# Altium PCB LiPo_batteries_charger.PcbDoc
Units mil, origin at the board's own origin, x right, y up, seen from the top; angles counter-clockwise.
Board outline 2240 x 2210 mil, 2 copper layers (Top Layer, Bottom Layer); 22 components, 10 nets, 59 pads, 11 vias.
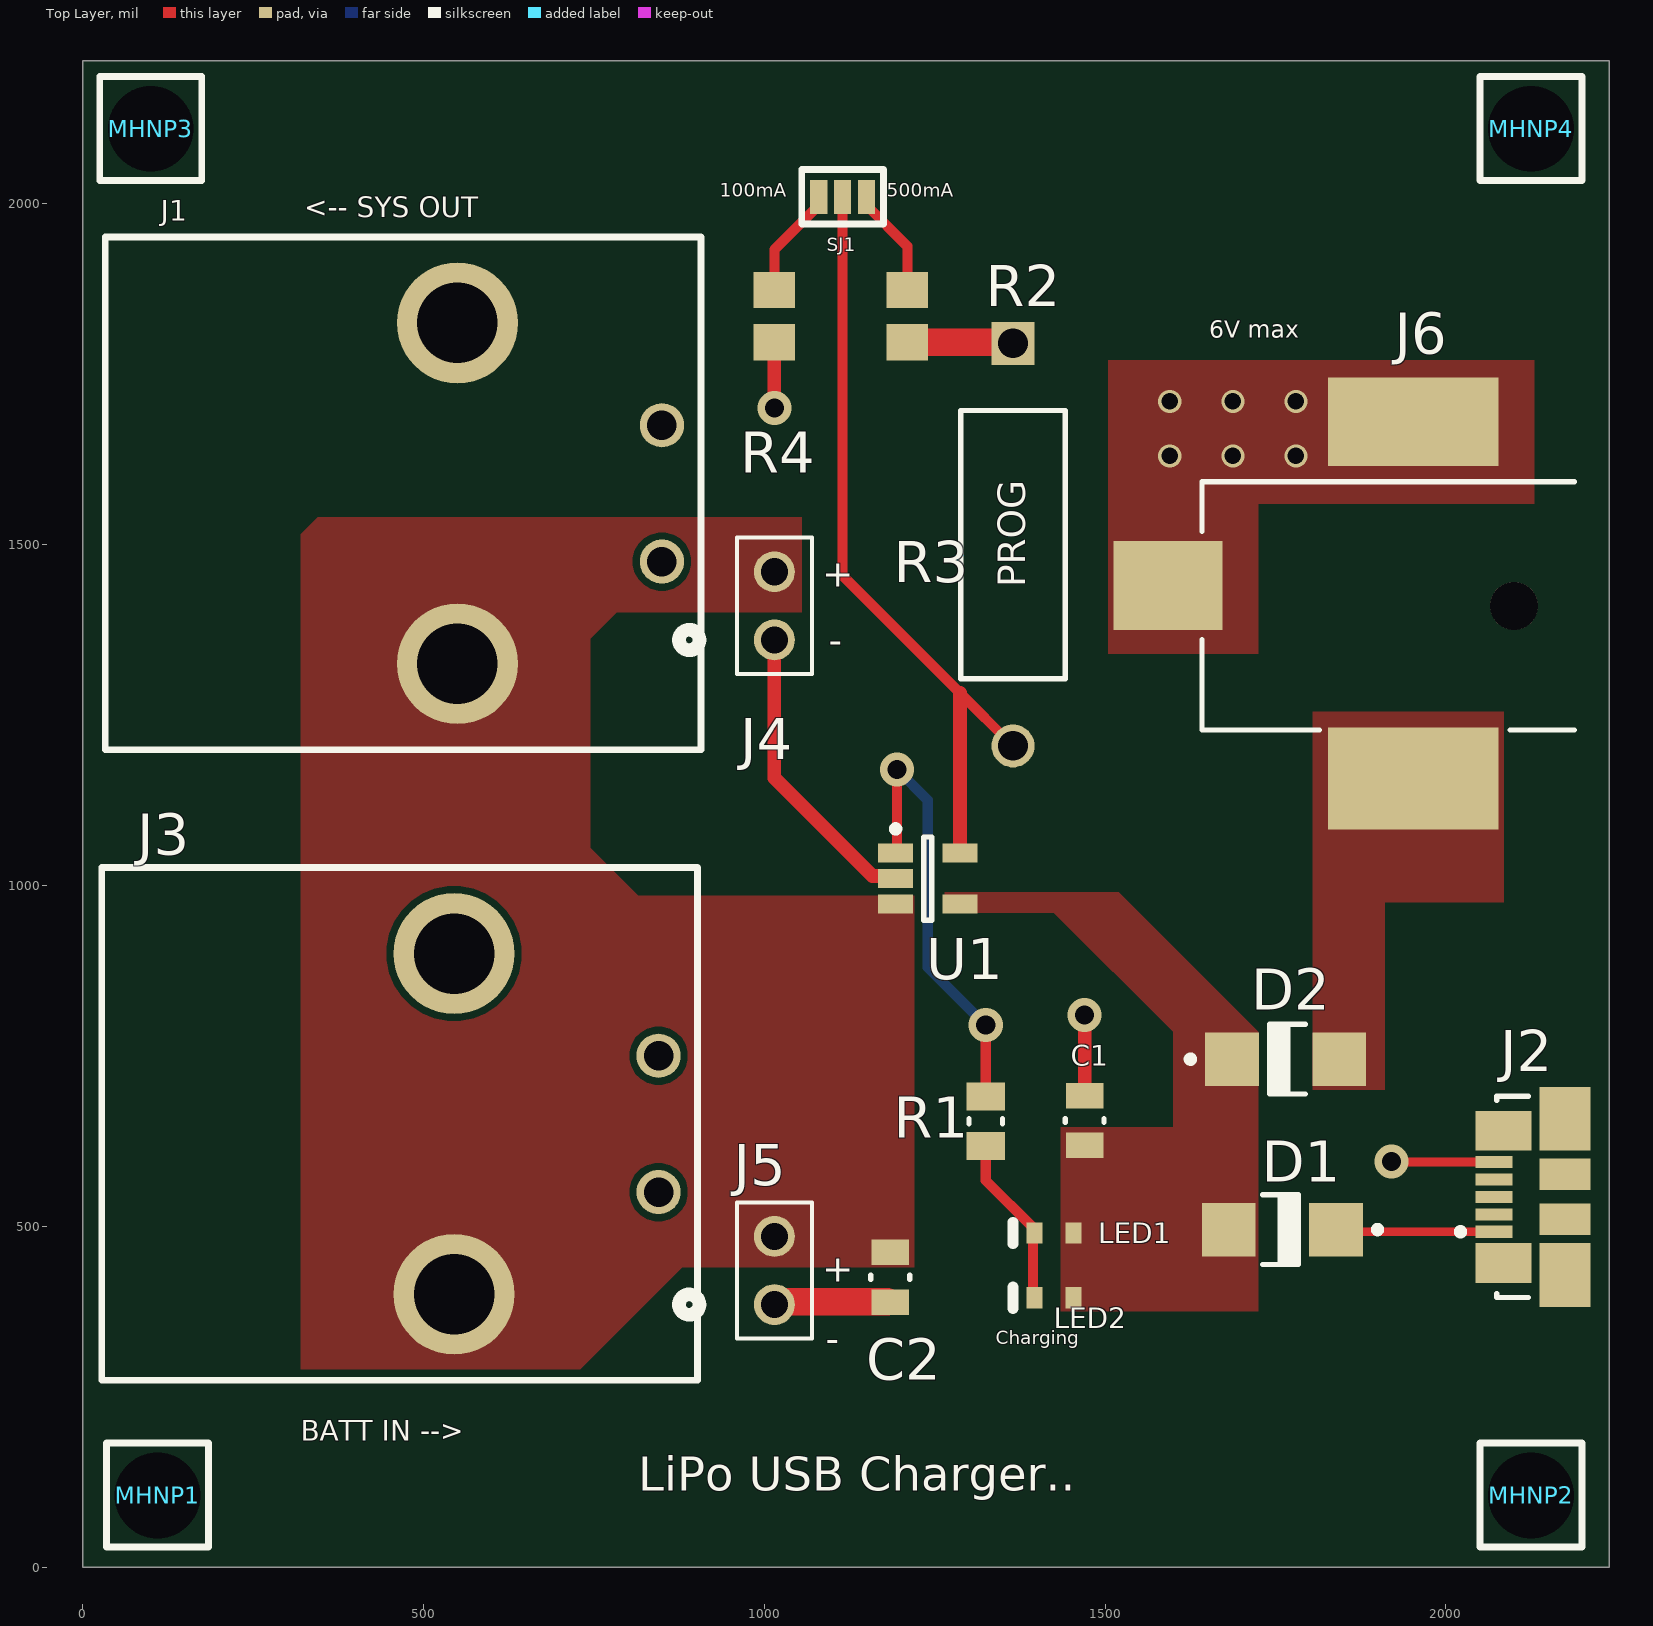
[diagram p0: Top Layer view]
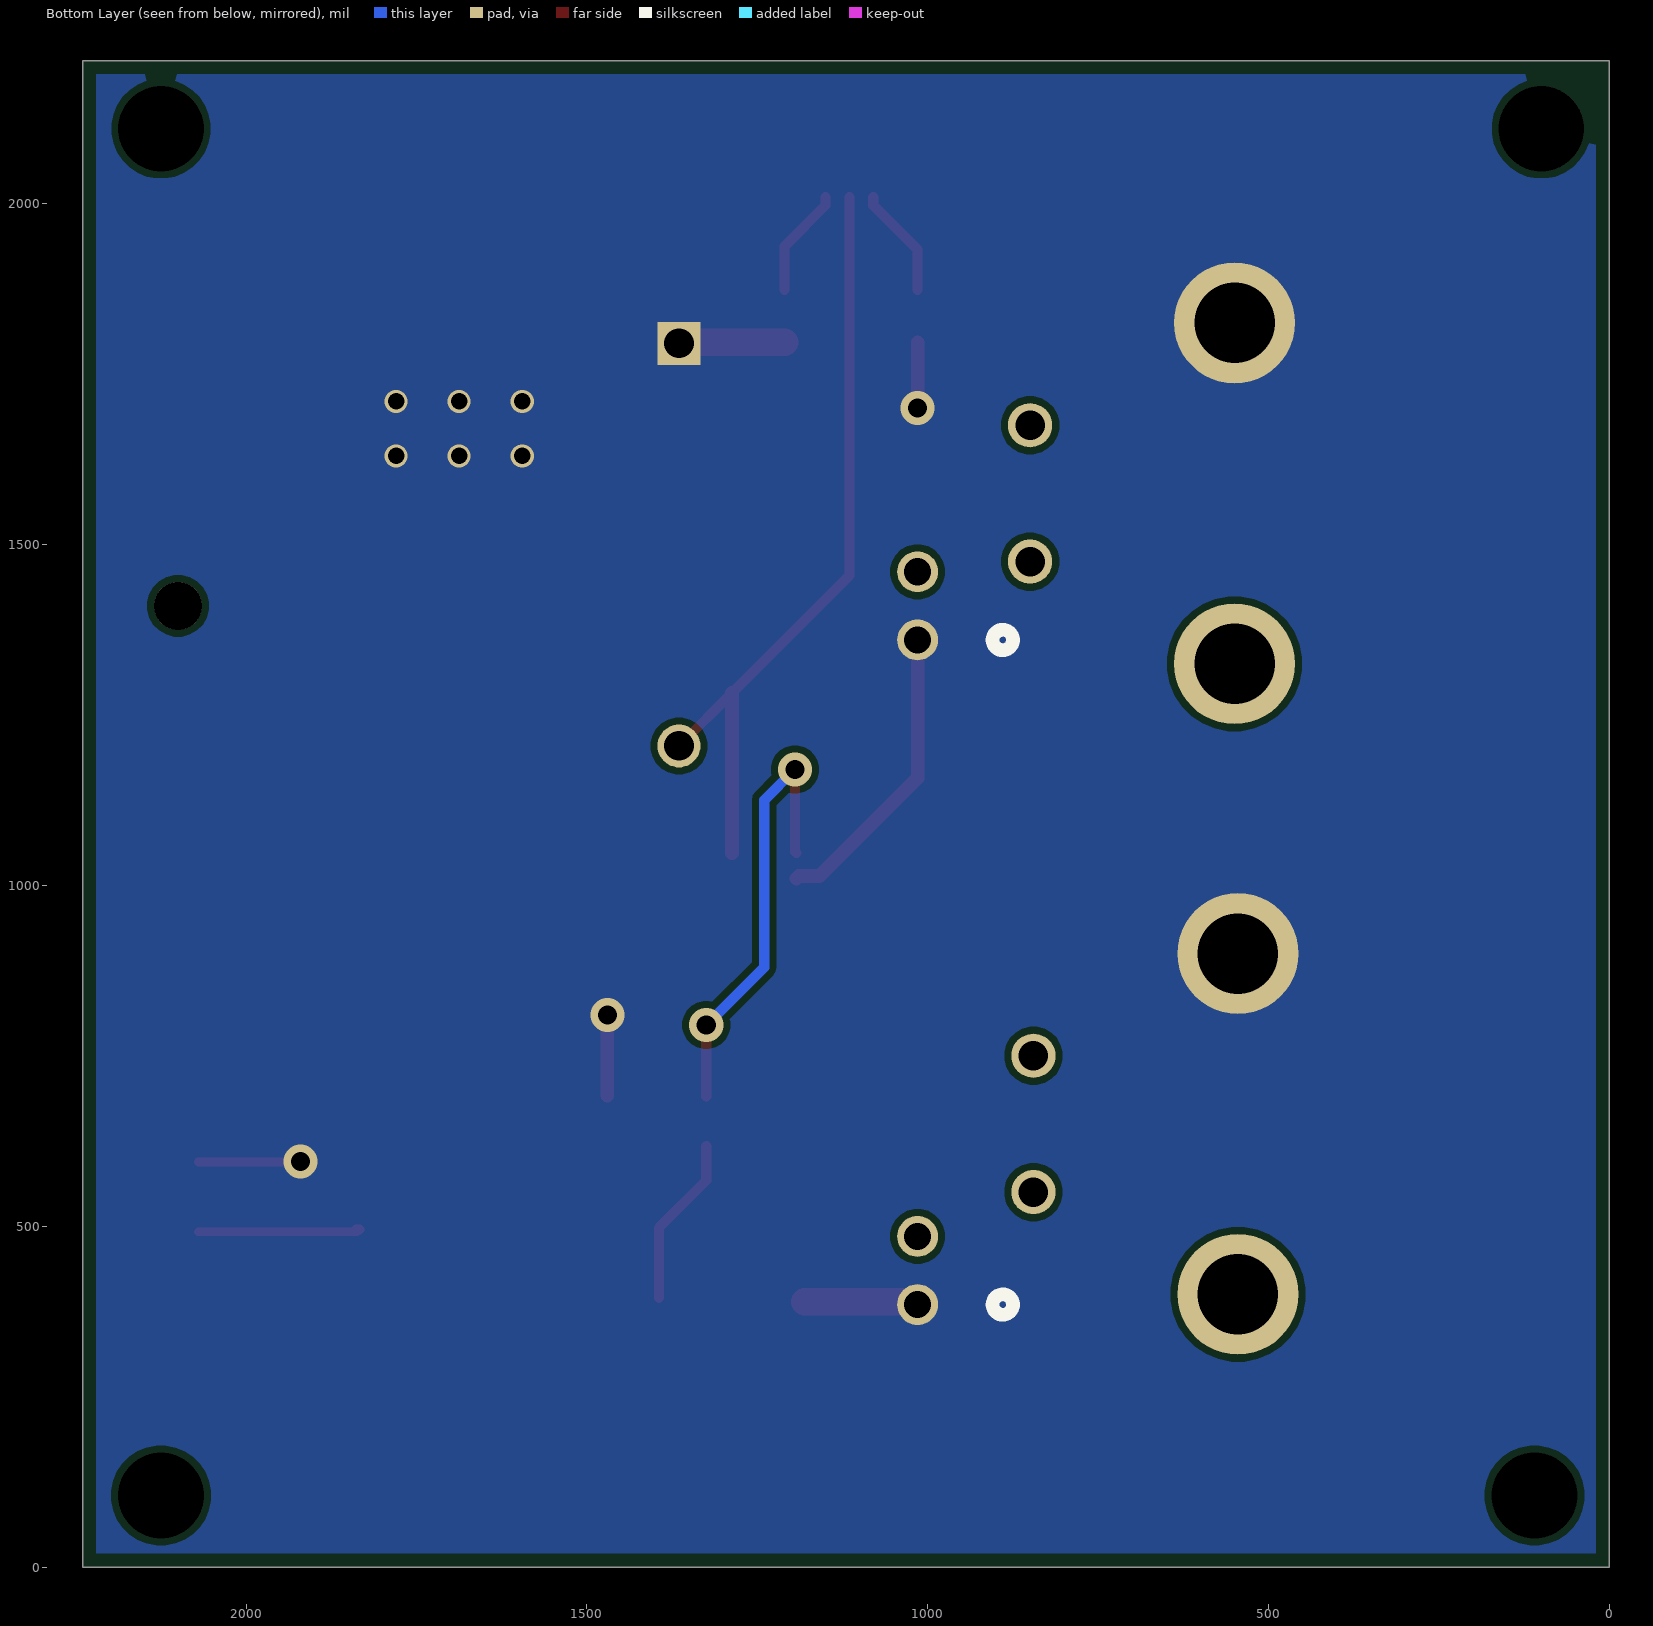
[diagram p1: Bottom Layer view, seen from below]

## Layer stack, top to bottom
Top Solder: solder mask 0.4, Solder Resist, Dk 3.5
Top Layer: signal copper 1.4
Dielectric 1: dielectric 12.6, FR-4, Dk 4.8
Bottom Layer: signal copper 1.4
Bottom Solder: solder mask 0.4, Solder Resist, Dk 3.5

## Board outline
0,0 0,2210 2240,2210 2240,0

## Design rules (kind name [scope] priority, off if disabled: settings)
BoardOutlineClearance [All] p1: gap=10 ignorepadtopadclearanceinfootprint=FALSE except(0: Arc-SplitContinuation Track-SplitContinuation SMDPad-SplitContinuation THPad-SplitContinuation Via-SplitContinuation Fill-SplitContinuation Poly-SplitContinuation Region-SplitContinuation Text-SplitContinuation; 20: Via-OutlineEdge Poly-OutlineEdge)
Clearance [All] p1: gap=10 ignorepadtopadclearanceinfootprint=TRUE
PolygonConnect [All] p1: connectstyle=Direct reliefconductorwidth=10 reliefentries=4 polygonreliefangle="90 Angle" airgapwidth=10
RoutingVias [All] p1: holewidth=28 width=50 viastyle="Through Hole" minholewidth=8 minwidth=16 maxholewidth=28 maxwidth=50
SolderMaskExpansion [All] p1: expansion=4 istentingtop=FALSE
SupplyNets "Schematic Supply Nets" [InNet('GND')] p1: voltage=0.000
Width [All] p1: maxlimit=40 minlimit=10 preferedwidth=10
30 further rules are at their usual default settings.

## Components (designator, comment, footprint, x,y, rotation, side; value= is the part's Value field where it differs from the comment)
C1 "4.7uF" FP-CC0805-0_85-MFG 1470,655 r90 top value="4.7 uF"
C2 "4.7uF" FP-CC0805-0_85-MFG 1185,425 r270 top value="4.7 uF"
D1 "40V, 1A" ONSC-SMA-2-403D-02_V 1760,495 r180 top
D2 "40V, 1A" ONSC-SMA-2-403D-02_V 1765,745 r0 top
J1 "CONN HEADER R/A 2POS 5.08MM" 1-179276-2 550,1825 r270 top
J2 "47346-0001" MOLX-47346-0001-5_V 2167.13,542.97 r90 top
J3 "CONN HEADER R/A 2POS 5.08MM" 1-179276-2 545,900 r270 top locked
J4 "2 POS VERT HEADER 0.100\"" 2Pins_AMP 1015,1360 r0 top
J5 "2 POS VERT HEADER 0.100\"" 2Pins_AMP 1015,385 r0 top
J6 "RASM722PTR13X" FP-RASM722PTR13X-MFG 1932.68,1410 r90 top locked
LED1 "RED" VISH-TLMS1000_V 1425,490 r180 top
LED2 "RED" VISH-TLMS1000_V 1425,395 r180 top
MHNP1 "Mounting Hole Non-Plated 3.2mm" MTHNP3P2MM 110,105 r90 top
MHNP2 "Mounting Hole Non-Plated 3.2mm" MTHNP3P2MM 2125,105 r90 top
MHNP3 "Mounting Hole Non-Plated 3.2mm" MTHNP3P2MM 100,2110 r90 top locked
MHNP4 "Mounting Hole Non-Plated 3.2mm" MTHNP3P2MM 2125,2110 r90 top locked
R1 "330" RESC2013X50X30NL20T20 1325,654.02 r90 top
R2 "PROG" VISH-A1-2_V2 1365,1499.72 r270 top
R3 "2k" RESC2013X70X40ML20T20 1210,1835 r270 top
R4 "10k" RESC2013X70X40ML20T20 1015,1835 r270 top
SJ1 "SJUMPER3POS" SJUMPER3POS-Footprint-1 1115,2010 r180 top
U1 "Charge Management Controller" SOT-23-OT5_M 1240,1010 r0 top

## Footprints (in the part's own frame and the unit in brackets; to place one, negate y for a bottom-side part, rotate by r counter-clockwise, add the part's x,y. Pads: shape width x height; smd on the part's side, far side on the other; paste and mask are expansions set on the pad)
1-179276-2 [mm]
  round 4.5 hole 3: 1(0,0) 2(12.7,0)
  round 1.65 hole 1.1: ""(3.81,7.62) ""(8.89,7.62)
  silkscreen extent -3.2,-13.13 15.9,9.08, body extent -3.02,-13.55 16.06,8.55, height 10.86
2Pins_AMP [mil]
  round 60 hole 40 mask+0: 1(0,0) 2(0,100)
  silkscreen extent -140,-50 55,150, body extent 0,0 10,10, height 10
FP-CC0805-0_85-MFG [mm]
  rect 0.95x1.4 smd paste+0 mask+0: 1(-0.925,0) 2(0.925,0)
  silkscreen extent -0.08,-0.72 0.08,0.72, body extent -1.6,-1.05 1.6,1.05, height 0.25
FP-RASM722PTR13X-MFG [mm]
  rect 3.3x4.06 smd paste+0 mask+0: 1(0.76,8.65)
  rect 3.81x6.35 smd paste+0 mask+0: 2(-6.43,-0.49)
  rect 3.3x6.35 smd paste+0 mask+0: 3(6.86,-0.49)
  round 1.78 hole 1.78 unplated paste-2539.97 mask+0: ""(0,-4.25)
  silkscreen extent -4.63,-6.5 4.63,7.38, body extent -8.43,-7.48 8.61,10.78, height 0.25
MOLX-47346-0001-5_V [mm] "SMD, 5-Leads, Body 7.5x5mm, Pitch 0.65mm"
  rect 0.45x1.38 smd: 1(-1.3,2.46) 2(-0.65,2.46) 3(0,2.46) 4(0.65,2.46) 5(1.3,2.46)
  rect 1.475x2.1 smd: 6(-2.462,2.1) 7(2.462,2.1)
  rect 2.375x1.9 smd: 8(-2.913,-0.2) 11(2.913,-0.2)
  rect 1.175x1.9 smd: 9(-0.837,-0.2) 10(0.837,-0.2)
  silkscreen extent -3.75,1.16 3.75,3.82, body extent -3.99,-2.78 3.99,2.65, height 2.69
MTHNP3P2MM [mm]
  round 1 hole 3.2: ""(0,0)
  silkscreen extent -1.92,-1.9 1.95,1.9
ONSC-SMA-2-403D-02_V [mm]
  rect 2x2 smd: 1(-2,0) 2(2,0)
  silkscreen extent -3.67,-1.3 0.74,1.3, body extent -2.16,-1.3 2.16,1.3, height 2.2
RESC2013X50X30NL20T20 [mm]
  rect 1.05x1.45 smd: 1(-0.925,0) 2(0.925,0)
  silkscreen extent -0.1,-0.63 0.1,0.63, body extent -1.1,-0.72 1.1,0.72, height 0.5
RESC2013X70X40ML20T20 [mm]
  rect 1.35x1.55 smd: 1(-0.975,0) 2(0.975,0)
  body extent -1.1,-0.72 1.1,0.72, height 0.7
SJUMPER3POS-Footprint-1 [mil]
  rect 25x50 smd: 1(-35,0) 2(0,0) 3(35,0)
  silkscreen extent -60,-40 60,40
SOT-23-OT5_M [mm]
  rect 1.3x0.7 smd: 1(-1.2,0.95) 2(-1.2,0) 3(-1.2,-0.95) 4(1.2,-0.95) 5(1.2,0.95)
  silkscreen extent -1.32,-1.55 0.15,1.97, body extent -0.9,-1.55 0.9,1.55, height 1.45
VISH-A1-2_V2 [mm]
  rect 1.6x1.6 hole 1.1: 1(-7.5,0)
  round 1.6 hole 1.1: 2(7.5,0)
  silkscreen extent -5,-1.95 5,1.95, body extent -7.91,-1.95 7.92,1.95, height 3.88
VISH-TLMS1000_V [mm]
  rect 0.6x0.8 smd: 1(-0.725,0) 2(0.725,0)
  silkscreen extent 1.52,-0.4 1.52,0.4, body extent -0.8,-0.4 0.8,0.4, height 0.65

## Part data
C1 C2: library part "CAP CER 4.7UF 6.3V X7R 0805", "4.7µF ±10% 6.3V Ceramic Capacitor X7R 0805 (2012 Metric)", Capacitance="4.7 uF", Manufacturer=Yageo, Manufacturer Part Number=CC0805KKX7R5BB475, Package=CC0805-0.85, Supplier Part Number 1=311-3419-1-ND, Temperature="-30°C to +85°C", Temperature Characteristic=X7R, Temperature Range High=+85°C, Temperature Range Low=-30°C, Tolerance=0.1, Voltage Rating="6.3 V", Automotive=No, Category=Cap, ComponentLink2Description=Datasheet, ComponentLink2URL=http://www.yageo.com/documents/recent/UPY-GPHC_Y5V_6.3V-to-50V_8.pdf, Device Class L1="Passive Components", Device Class L2=Capacitors, Device Class L3="Ceramic Capacitors", Digikey Description="CAP CER 4.7UF 6.3V X7R 0805", Footprint Url=http://www.yageo.com/exep/pages/download/literatures/UPY-C_GEN_24.pdf, Height=0.95mm, Ipc Land Pattern Name=CAPC200125X85, Lead Free=Yes, Material=Ceramic, Mouser Description="Multilayer Ceramic Capacitors MLCC - SMD/SMT 4.7uF 6.3V X7R 10%", Octopart=https://octopart.com/cc0805kkx7r5bb475-yageo-27548069, RoHS=TRUE, Supplier 1=Digi-Key, Supplier 2=Digi-Key, Supplier Part Number 2=311-3419-2-ND
D1 D2: library part "DIODE SCHOTTKY 40V 1A SMA", "Schottky Power Rectifier, 2-Pin SMA, Pb-Free, Cut Tape, Diode Schottky 40V 1A Surface Mount SMA", Manufacturer="ON Semiconductor", Manufacturer Part Number=MBRA140T3G, Supplier Part Number 1=MBRA140T3GOSCT-ND, ComponentLink1Description="Manufacturer URL", ComponentLink1URL=http://www.onsemi.com/, ComponentLink2Description=Datasheet, ComponentLink2URL=http://www.onsemi.cn/pub_link/Collateral/MBRA140T3-D.PDF, ComponentLink3Description="Package Specification", ComponentLink3URL=http://www.onsemi.com/pub_link/Collateral/403D-02.PDF, Configuration=Single, DatasheetVersion="Rev. 10", IFSM Max (A)=30, Mounting Technology="Surface Mount", PackageDescription="2-Pin Small Molded Package, J-Bend Lead, Body 2.605 x 4.315 mm", PackageReference=SMA-2-403D-02, PackageVersion="Rev. G, 07/2012", Packing="Tape and Reel", PartNumber=MBRA140T3G, RoHS=TRUE, Supplier 1=Digi-Key
J1 J3: "Connector Header Through Hole, Right Angle 2 position 0.200\" (5.08mm)", Manufacturer="TE Connectivity AMP Connectors", Manufacturer Part Number=1-179276-2, Supplier Part Number 1=A29545-ND, ComponentLink1Description="Product URL", ComponentLink1URL=https://www.te.com/usa-en/product-1-179276-2.html?te_bu=Cor&te_type=other&te_campaign=oct_glo_manufacturer&elqCampaignId=26136, Supplier 1=Digi-Key
J2: library part "CONN RCPT USB2.0 MICRO B SMD R/A", "Micro-USB B Receptacle with Flange, -30 to 85 degC, 5-Pin SMD, RoHS, Tape and Reel", Color=Black, Manufacturer=Molex, Maximum Current Rating=1.8/ContactA, Maximum Voltage Rating=30VAC, Operating Temperature=-30to85C, Supplier Part Number 1=WM17141CT-ND, Body Orientation=RightAngle, Contact Material=CopperAlloy, Contact Plating=GoldOverPalladiumNickelOverNickel, Datasheet URL=https://datasheet.ciiva.com/30075/304740473460001-io-nectors-30075527.pdf, Datasheet Version=Dec-13, Dimension=7.8x5.43x2.94mm, Gender=RCP, Housing Material=LiquidCrystalPolymer, Manufacturer Part Number=47346-0001, Manufacturer URL=http://www.molex.com/, Mounting=SurfaceMount, Number of Contacts=5, Number of Ports=1, Number of Terminals=5, Packaging=EmbossedTapeandReel, Pitch=0.65mm, RoHS=Yes, Supplier 1=Digi-Key, Termination Method=Solder, Type=MicroUSBTypeB
J4 J5: library part "CONN HEADER VERT 2POS 0.100\"", "Connector Header Through Hole 2 position", Manufacturer="Amphenol ICC (FCI)", Manufacturer Part Number=67997-402HLF, Supplier Part Number 1=609-5502-ND, Built_By=EMA_UL_Team, Copyright="Copyright (C) 2018 Accelerated Designs. All rights reserved", RefDes=RefDes, SourceLibrary=Amphenol_2013-08-06_Bergstik_2Row_67997, Supplier 1=Digi-Key
J6: library part "CONN PWR JACK 2.1X5.5MM SOLDER", "Power Barrel Connector Jack 2.10mm ID (0.083\"), 5.50mm OD (0.217\") Surface Mount, Right Angle", Case/Package=SMD/SMT, Color=Black, Current Rating=5A, Manufacturer=Switchcraft, Package Quantity=120, Supplier Part Number 1=SC2028-1-ND, Connector Type=Jack, Contact Material="Copper Alloy", Contact Plating=Tin, Gender=Male, Housing Color=Black, Housing Material=Thermoplastic, Manufacturer Part Number=RASM722PTR13X, Mount="Surface Mount", Shielding=Unshielded, Supplier 1=Digi-Key, Termination=Solder
LED1 LED2: library part "LED RED 0603 SMD", "Low Current LED, 40 mW, 1.8 V, -40 to 100 degC, 2-Pin SMD (0603), RoHS, Tape and Reel", Forward Current If=2mA, Forward Voltage=1.8V, LED Colour=Red, Manufacturer=Vishay, Manufacturer Part Number=TLMS1000-GS08, Package Description="2-Pin Surface Mount Device, Body 1.6 x 0.8 mm", Package Reference=TLMS1000, Supplier Part Number 1=TLMS1000-GS08CT-ND, Automotive Qualification Standard=AEC-Q100, Bulb Size=1.6mmx0.8mm, Datasheet URL=https://datasheet.ciiva.com/5798/1698881-5798337.pdf, Datasheet Version="Rev. 1.7, 02/2011", LED Mounting=SMD, Lens Shape=Rectangular, Luminous Intensity=4mcd, Manufacturer URL=http://www.vishay.com/, Mounting Technology=SurfaceMount, MSL=MSL2-1year, Packaging=CutTape, Product Range=-, Supplier 1=Digi-Key, SVHC=ToBeAdvised, Viewing Angle=80°, Wavelength Typ=636nm
MHNP1 MHNP2 MHNP3 MHNP4: library part MTHNP3P2MM, "Mounting Hole Non-Plated 3.2 mm drill hole", Manufacturer=N/A, Manufacturer Part Number=N/A
R1: library part "RES SMD 330 OHM 1% 1/8W 0805", "330 Ohms ±1% 0.125W, 1/8W Chip Resistor 0805 (2012 Metric) Automotive AEC-Q200 Thick Film", Manufacturer=Vishay, Manufacturer Part Number=CRCW0805330RFKEA, Supplier Part Number 1=541-330CCT-ND, Supplier 1=Digi-Key
R2: library part "RES 62K OHM 2W 5% AXIAL", "Power Metal Film Leaded Resistor, 62 KOhm +/-5%, 2 W, 2-Pin THD, RoHS, Ammo Pack62 kOhms ±5% 2W Through Hole Resistor Axial Automotive AEC-Q200, Flame Retardant Coating, Safety Metal Film", Manufacturer="Vishay Semiconductor", Manufacturer Part Number=PR02000206202JR500, PartNumber=PR02000206202JA100, Power="2 W", Resistance="62 KOhm", Supplier Part Number 1=PPC62KW-2CT-ND, Temperature Coefficient="+/-250 ppm/degC", Tolerance=+/-5%, ComponentLink1Description="Manufacturer URL", ComponentLink1URL=http://www.vishay.com/, ComponentLink2Description=Datasheet, ComponentLink2URL=http://www.vishay.com/docs/28729/28729.pdf, ComponentLink3Description="Package Specification", ComponentLink3URL=http://www.vishay.com/docs/28729/28729.pdf, DatasheetVersion=Jun-13, Mounting Technology="Through Hole", PackageDescription="2-Pin Axial Lead, Body 10 x 3.9 mm", Packing="Ammo Pack", RoHS=TRUE, Supplier 1=Digi-Key
R3: library part "RES SMD 2K OHM 5% 1/8W 0805", "2 kOhms ±5% 0.125W, 1/8W Chip Resistor 0805 (2012 Metric) Automotive AEC-Q200 Thick Film", Manufacturer=Panasonic, Manufacturer Part Number=ERJ-6GEYJ202V, Supplier Part Number 1=P2.0KACT-ND, Supplier 1=Digi-Key
R4: library part "RES SMD 10K OHM 1% 1/8W 0805", "10 kOhms ±1% 0.125W, 1/8W Chip Resistor 0805 (2012 Metric) Automotive AEC-Q200 Thick Film", Manufacturer=Panasonic, Manufacturer Part Number=ERJ-6ENF1002V, Supplier Part Number 1=P10.0KCCT-ND, Supplier 1=Digi-Key
SJ1: "Solder jumper 3 pads and pins", Manufacturer=N/A, Component Type=Miscellaneous, Manufacturer Part Number=N/A, Pins=3
U1: library part "IC LI-ION/LI-POLY CTRLR SOT23-5", "Simple, Miniature Single-Cell, Fully Integrated Li-Ion/Li-Polymer Charge Management Controller, 4.2V, 5-Pin SOT-23, Industrial Temperature, Cut Tape", Manufacturer=Microchip, Manufacturer Part Number=MCP73811T-420I/OT, Supplier Part Number 1=MCP73811T-420I/OTCT-ND, Code_IPC=SOT23-5, DatasheetVersion="revB, Sep-2007", PackageDescription="5-Lead Plastic Small Outline Transistor (OT) [SOT-23]", PackageReference=SOT-23-OT5, PackageVersion="revBB, Aug-2009", Supplier 1=Digi-Key

## Via types
v1: diameter 34, hole 24, Top Layer to Bottom Layer, 6 vias
v2: diameter 50, hole 28, Top Layer to Bottom Layer, 5 vias

## Nets (pads, with @x,y where several pads share a name; then routed paths per layer and width w, separated by ;. In a path a pad name is that pad's centre, name@x,y a point inside that pad or via, vN(x,y) a via of type N, cw(c..) or ccw(c..) an arc to the next point about the centre after c; other vN are vias at no path point)
GND: C1.2 C2.2 J1.1 J2.5 J3.1 J4.1 J5.1 J6.1 J6.3 R2.1 R3.2 R4.2 U1.2 | length 1136.4
  Top Layer w13: v2(1920,595) 1920.61,594.39 2070.04,594.39 J2.5
  Top Layer w20: J5.1 J5.1@1019.29,389.29 ; J4.1 1015,1157.5 1158.88,1013.62 1189.13,1013.62 U1.2 ; v2(1015,1700) R4.2 ; C2.2@1180.71,389.29 C2.2@1185,393.58 ; R2.1@1363.39,1796.61 R2.1 ; C1.2 v2(1470,810)
  Top Layer w40: J5.1@1019.29,389.29 C2.2@1180.71,389.29 ; R3.2 R2.1@1363.39,1796.61
  other v1: 1595,1630 1687.5,1630 1780,1630 1595,1710 1687.5,1710 1780,1710
NetC1_1: C1.1 D1.2 D2.1 LED1.1 LED2.1 U1.4
NetC2_1: C2.1 J1.2 J3.2 J4.2 J5.2 U1.3
NetD1_1: D1.1 J2.1 | length 244.1
  Top Layer w12: D1.1 D1.1@1839.59,494.15
  Top Layer w13: D1.1@1833.74,495 1836.95,491.79 J2.1
  Top Layer w15: D1.1@1833.74,495 D1.1
NetD2_2: D2.2 J6.2
NetLED1_2: LED1.2 LED2.2 R1.1 | length 251.4
  Top Layer w15: R1.1 1325,566.96 1394.51,497.45 LED2.2@1394.51,395
NetR1_2: R1.2 U1.1 | length 656.9
  Top Layer w15: U1.1 1195,1049.65 v2(1195,1170) ; R1.2 v2(1325,795)
  Bottom Layer w15: v2(1195,1170) 1240,1125 1240,880 v2(1325,795)
NetR2_2: R2.2 SJ1.2 U1.5 | length 1147.5
  Top Layer w15: SJ1.2 1115,1454.45 1284.72,1284.72 ; 1287.24,1282.2 1284.72,1284.72 ; R2.2 1284.72,1284.72
  Top Layer w20: U1.5 1287.24,1282.2
NetR3_1: R3.1 SJ1.1 | length 161.5
  Top Layer w15: SJ1.1 1150,1997.5 1210.04,1937.46 R3.1
NetR4_1: R4.1 SJ1.3 | length 163.5
  Top Layer w15: R4.1 1015,1932.5 1080,1997.5 SJ1.3
pads on no net: J1. J2.2 J2.3 J2.4 J2.6 J2.7 J2.8 J2.9 J2.10 J2.11 J3. J6. MHNP1. MHNP2. MHNP3. MHNP4.

## Polygon pours and split planes (outlines as drawn)
GND on Bottom Layer "GND_L02_P000" (solid, pour order 0): 0,2210 2240,2210 2240,0 0,0
NetC1_1 on Top Layer "NETC1_1_L01_P006" (solid, pour order 6): 1435,645 1435,375 1725,375 1725,785 1520,990 1265,990 1265,960 1425,960 1600,785 1600,645
NetC2_1 on Top Layer "NETC2_1_L01_P005" (solid, pour order 5): 783.81,1400.5 1055,1400.5 1055,1540 345,1540 320,1515 320,290 730,290 880,440 1220,440 1220,985 815,985 745,1055 745,1361.69
NetD2_2 on Top Layer "NETD2_2_L01_P004" (solid, pour order 4): 2085,1255 2085,975 1910,975 1910,700 1805,700 1805,1255
GND on Top Layer "GND_L01_P001" (solid, pour order 1): 1505,1340 1725,1340 1725,1560 2130,1560 2130,1770 1505,1770

## Silkscreen, mask and mechanical layers (free items; w line width, h text height)
Top Overlay:
  text "100mA" at 935,2010 h20
  text "500mA" at 1180,2010 h20
  text "<-- SYS OUT" at 325,1980 h30
  text "6V max" at 1653,1803 h25
  text "+" at 1085,1438.34 h40
  text "PROG" at 1383,1437 h40 r90
  text "-" at 1095,1340.01 h40
  text "+" at 1085,418.34 h40
  text "Charging" at 1340,326.66 h20
  text "-" at 1090,315.01 h40
  text "BATT IN -->" at 320,185 h30
  text "LiPo USB Charger.." at 815,111.66 h50

## Text inside footprints (layer, text, board x,y; h text height)
J2: Mechanical 6 "PCB EDGE" at 2236.3,259.51 h11.81 r90
J4: Mechanical 7 "0.19in/4.826mm" at 410,1397.5 h25; Mechanical 7 "0.095in/2.413mm" at 347.5,1445 h25; Mechanical 7 "0.1in/2.54mm" at 1185,1397.5 h25; Mechanical 7 "0.1in/2.54mm" at 940,1935 h25; Mechanical 7 "0.1in/2.54mm" at 890,1610 h25
J5: Mechanical 7 "0.095in/2.413mm" at 347.5,470 h25; Mechanical 7 "0.19in/4.826mm" at 410,422.5 h25; Mechanical 7 "0.1in/2.54mm" at 1185,422.5 h25; Mechanical 7 "0.1in/2.54mm" at 940,960 h25; Mechanical 7 "0.1in/2.54mm" at 890,635 h25